# Altium PCB RAK3362_VB_260329_1.PcbDoc
Units mm, origin at the board's own origin, x right, y up, seen from the top; angles counter-clockwise.
Board outline 20 x 30 mm, 4 copper layers (Top Layer, gnd, power, Bottom Layer), stack 1 mm thick; 35 components, 51 nets, 161 pads, 201 vias.
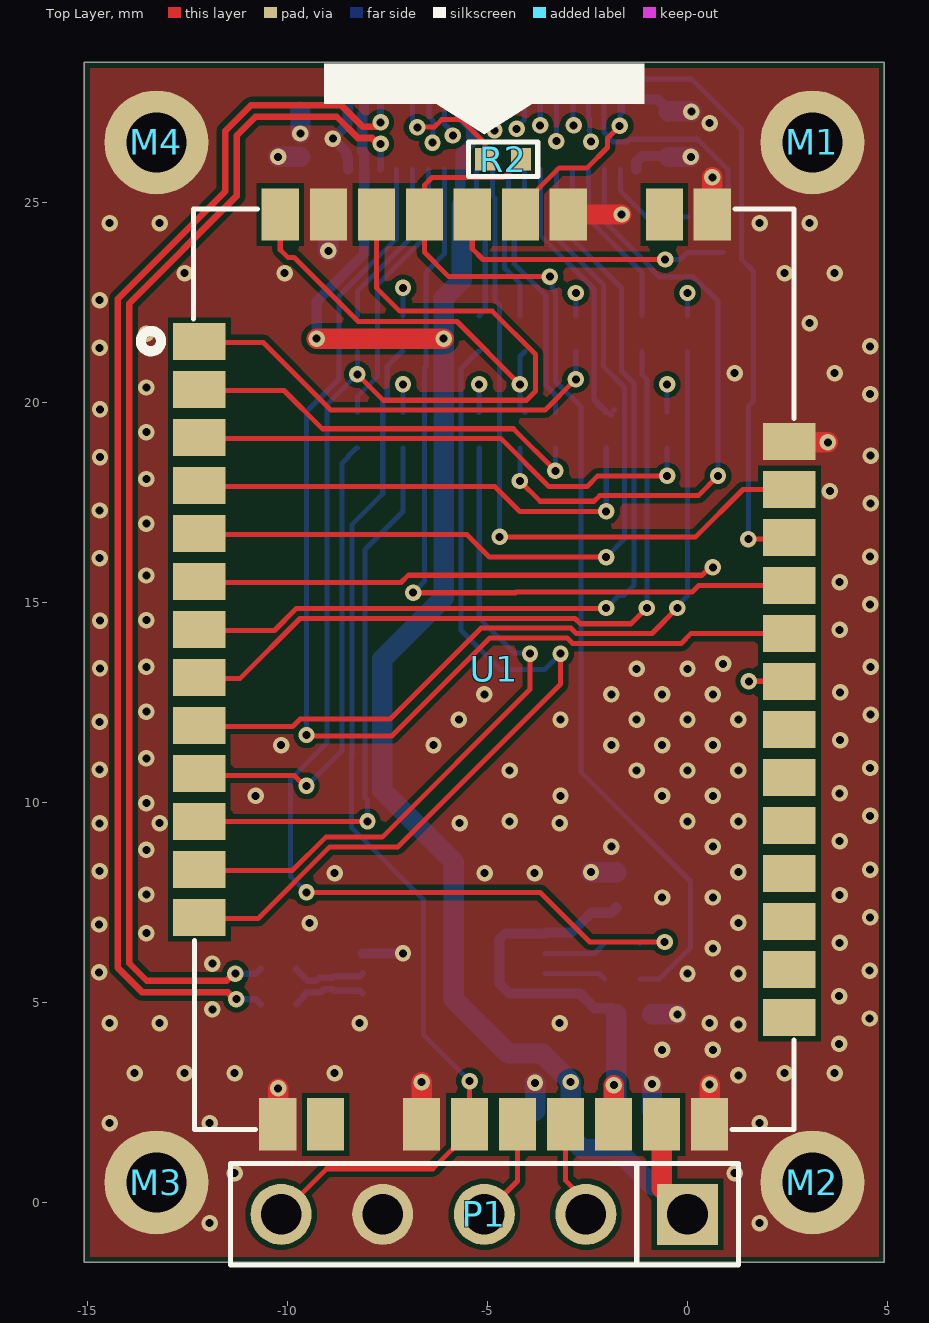
[diagram p0: Top Layer view]
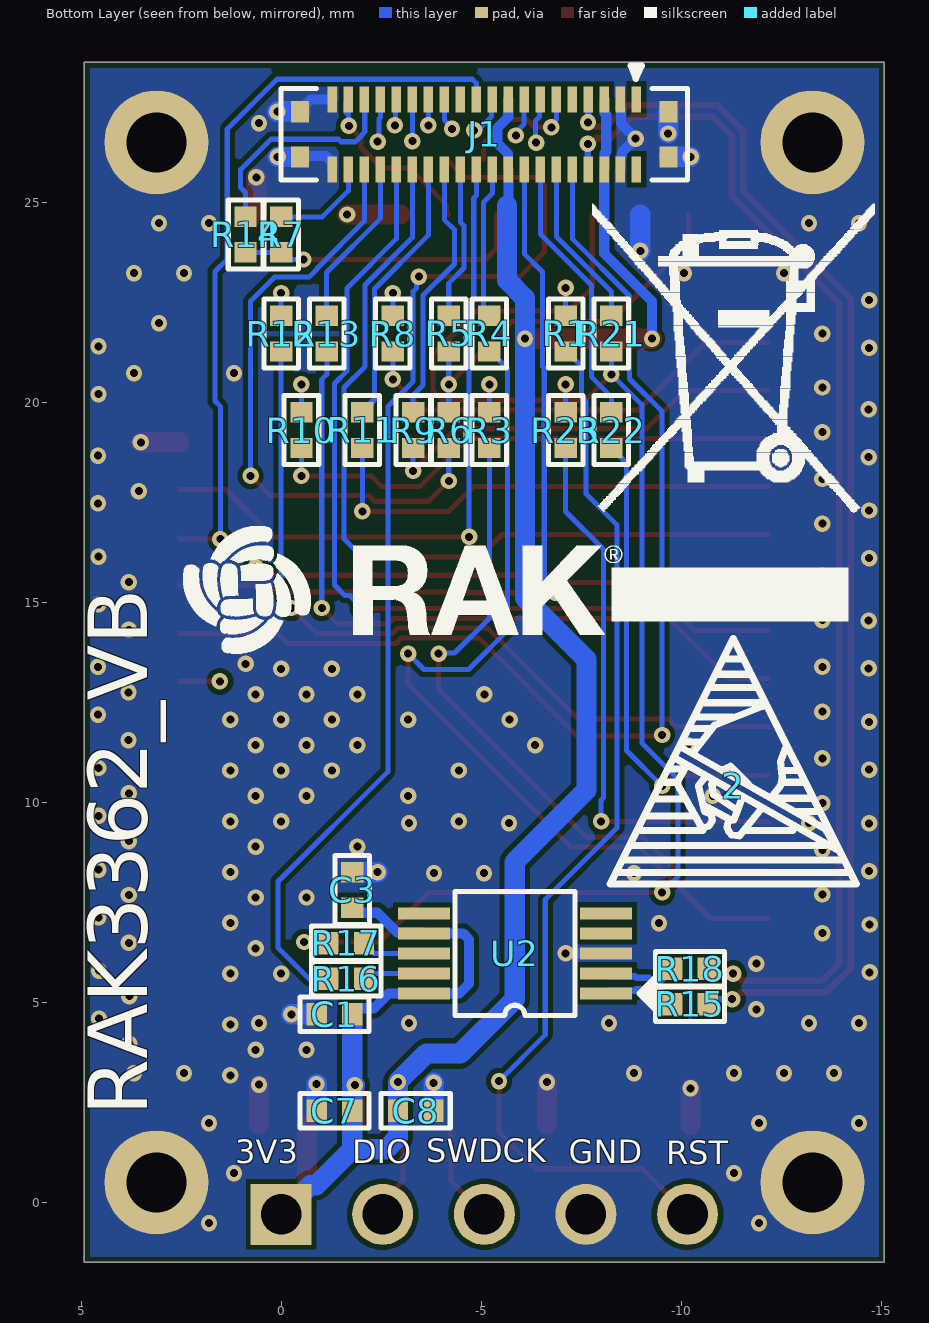
[diagram p1: Bottom Layer view, seen from below]
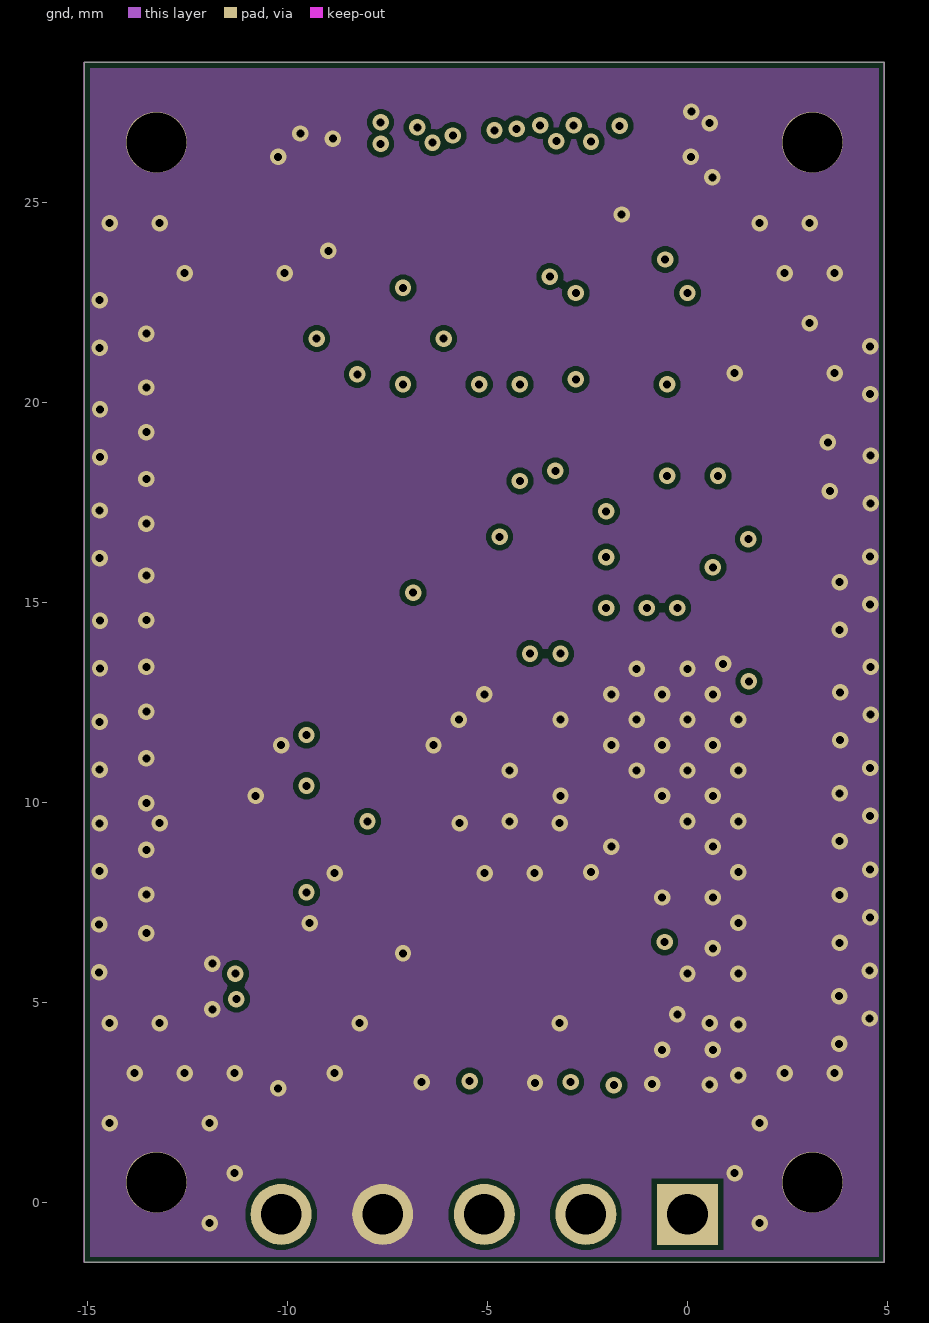
[diagram p2: gnd]
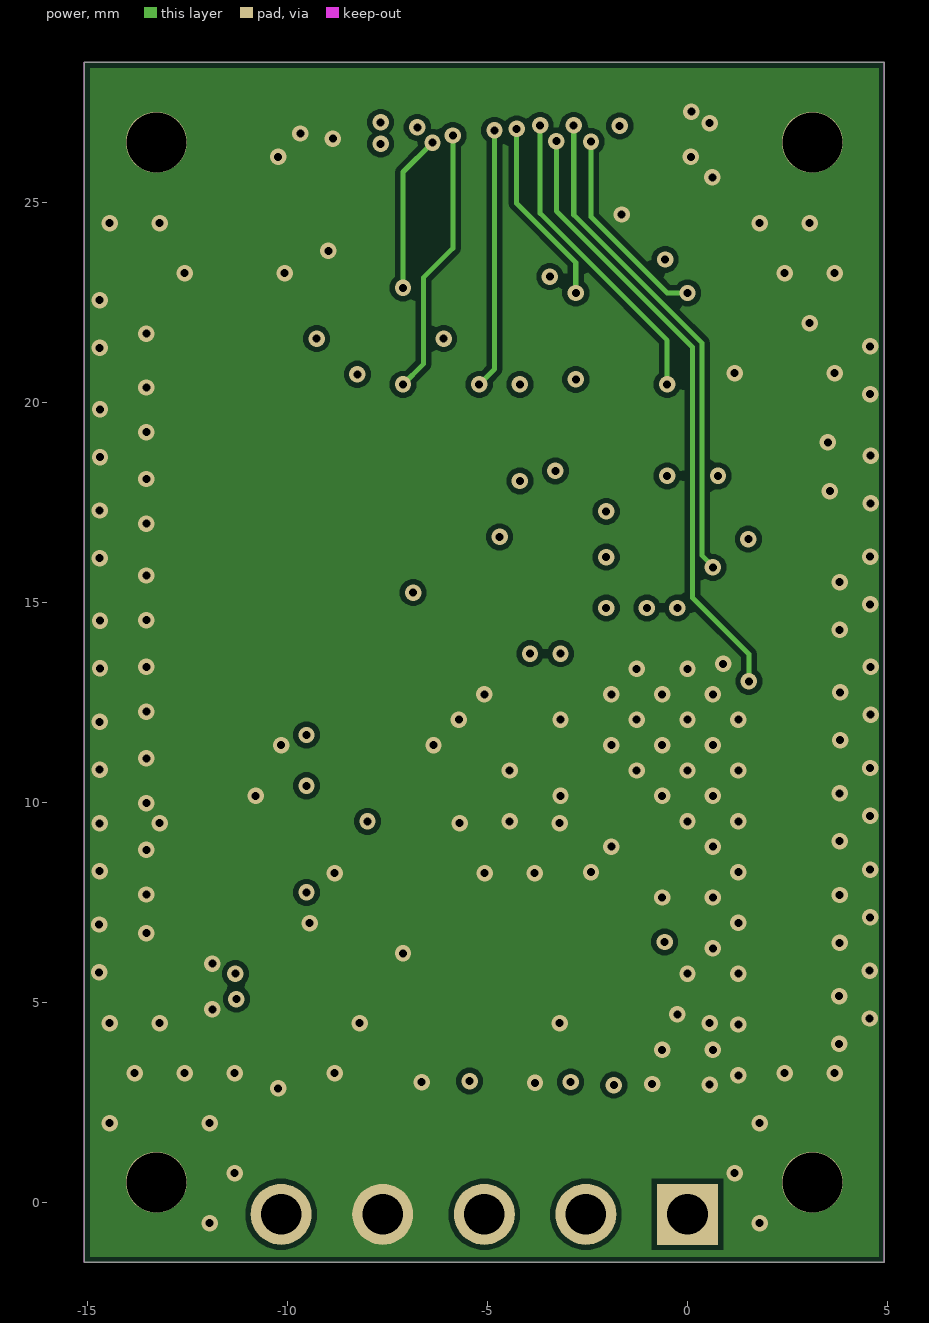
[diagram p3: power]

## Layer stack, top to bottom
Top Layer: signal copper 0.0356
Dielectric 2: prepreg 0.1524, PP-006, Dk 4.1
gnd: signal copper 0.0356
Dielectric 1: dielectric 0.553, FR-4, Dk 4.8
power: signal copper 0.0356
Dielectric 3: prepreg 0.1524, PP-006, Dk 4.1
Bottom Layer: signal copper 0.0356

## Board outline
-15.08,-1.5 4.92,-1.5 4.92,28.5 -15.08,28.5

## Design rules (kind name [scope] priority, off if disabled: settings)
Clearance rf_s [InNetClass('RF')] p1: gap=0.127 ignorepadtopadclearanceinfootprint=FALSE except(0.178: Arc-Fill Arc-Poly Arc-Region Track-Fill Track-Poly Track-Region)
Clearance [All] p2: gap=0.127 ignorepadtopadclearanceinfootprint=FALSE except(0.114: Arc-Arc Arc-Track Arc-SMDPad Track-Track Track-SMDPad)
DiffPairsRouting [All] p1: maxlimit=0.254 minlimit=0.119 mostfreqgap=0.119 toplayer_minwidth=0.165 toplayer_maxwidth=0.165 toplayer_prefwidth=0.165 midlayer1_minwidth=0.165 midlayer1_maxwidth=0.165 midlayer1_prefwidth=0.165 midlayer2_minwidth=0.165 midlayer2_maxwidth=0.165 midlayer2_prefwidth=0.165 bottomlayer_minwidth=0.165 bottomlayer_maxwidth=0.165 bottomlayer_prefwidth=0.165 maxuncoupledlength=12.7
MinimumSolderMaskSliver [All] p1: minsoldermaskwidth=0.05
PlaneConnect [All] p1: planeconnectstyle=Direct reliefexpansion=0.508 reliefentries=4 reliefconductorwidth=0.254 reliefairgap=0.254
PolygonConnect [All] p1: connectstyle=Direct reliefconductorwidth=0.254 reliefentries=4 polygonreliefangle="90 Angle" airgapwidth=0.254
RoutingPriority [InNetClass('RF_WIDTH')] p1: routingpriority=1
RoutingVias [All] p1: holewidth=0.2 width=0.41 viastyle="Through Hole" minholewidth=0.2 minwidth=0.41 maxholewidth=0.2 maxwidth=0.41
SilkToSilkClearance [All] p1: silktosilkclearance=0.025
SilkToSolderMaskClearance [IsPad] p1: minsilkscreentomaskgap=0.025 clearancetoexposedcopper=TRUE
SolderMaskExpansion [All] p1: expansion=0.102 istentingtop=FALSE
Width rf_p [InNetClass('RF')] p1: maxlimit=0.5 minlimit=0.257 preferedwidth=0.257
Width power_p [InNetClass('power')] p2: maxlimit=0.508 minlimit=0.254 preferedwidth=0.381
Width [InNetClass('All Nets')] p3: maxlimit=0.508 minlimit=0.127 preferedwidth=0.254
24 further rules are at their usual default settings.

## Classes and differential pairs
differential pair USBD: +USBD_P -USBD_N
differential pair NewDifferentialPair1: +USB_P -USB_N

## Components (designator, comment, footprint, x,y, rotation, side; value= is the part's Value field where it differs from the comment)
2 "Comment" ESD_ICON -11.303,10.414 r180 bottom
C1 "CAPACITOR NP" sc0402 -1.333,4.699 r180 bottom
C3 "CAPACITOR NP" sc0402 -1.778,7.81 r90 bottom
C7 "CAPACITOR NP" sc0402 -1.333,2.286 r180 bottom
C8 "CAPACITOR NP" sc0402 -3.365,2.286 r0 bottom
J1 "BTB40" BTB40_2X20_4MM_M -5.08,26.7 r270 bottom locked
M1 "LuoDingK" M15_26 3.12,26.5 r0 top
M2 "LuoDingK" M15_26 3.12,0.5 r0 top locked
M3 "LuoDingK" M15_26 -13.28,0.5 r180 top locked
M4 "LuoDingK" M15_26 -13.28,26.5 r180 top
P1 "Header1X5" PH254-115-05 -5.08,-0.3 r270 top locked
R1 "RESISTOR" sr0402 -7.112,21.717 r270 bottom
R2 "RESISTOR" sr0402 -4.609,26.078 r0 top
R3 "RESISTOR" sr0402 -5.207,19.304 r270 bottom
R4 "RESISTOR" sr0402 -5.207,21.717 r90 bottom
R5 "RESISTOR" sr0402 -4.191,21.717 r270 bottom
R6 "RESISTOR" sr0402 -4.191,19.304 r90 bottom
R7 "RESISTOR" sr0402 0,24.194 r270 bottom
R8 "RESISTOR" sr0402 -2.794,21.717 r270 bottom
R9 "RESISTOR" sr0402 -3.302,19.304 r90 bottom
R10 "RESISTOR" sr0402 -0.508,19.304 r270 bottom
R11 "RESISTOR" sr0402 -2.032,19.304 r90 bottom
R12 "RESISTOR" sr0402 0,21.717 r270 bottom
R13 "RESISTOR" sr0402 -1.143,21.717 r90 bottom
R14 "RESISTOR" sr0402 0.889,24.194 r270 bottom
R15 "RESISTOR" sr0402 -10.223,4.953 r180 bottom
R16 "RESISTOR" sr0402 -1.629,5.588 r180 bottom
R17 "RESISTOR" sr0402 -1.63,6.477 r180 bottom
R18 "RESISTOR" sr0402 -10.223,5.842 r180 bottom
R21 "RESISTOR" sr0402 -8.255,21.717 r90 bottom
R22 "RESISTOR" sr0402 -8.255,19.304 r90 bottom
R23 "RESISTOR" sr0402 -7.112,19.304 r270 bottom
U1 "RAK3162" RAK4630 -4.83,13.323 r0 top
U2 "CH340E" MSOP-10 -5.842,6.223 r0 bottom
? "Comment" BIN_WEEE -11.303,21.082 r180 bottom

## Footprints (in the part's own frame and the unit in brackets; to place one, negate y for a bottom-side part, rotate by r counter-clockwise, add the part's x,y. Pads: shape width x height; smd on the part's side, far side on the other; paste and mask are expansions set on the pad)
BIN_WEEE [mm]
  silkscreen extent -3.52,-6.56 3.54,3.87
BTB40_2X20_4MM_M [mm] "BTB40_2X20_4MM_M"
  rect 0.65x0.23 smd mask+0.051: 1(-0.874,3.8) 2(0.876,3.8) 3(-0.874,3.4) 4(0.876,3.4) 5(-0.874,3) 6(0.876,3) 7(-0.874,2.6) 8(0.876,2.6) 9(-0.874,2.2) 10(0.876,2.2) 11(-0.874,1.8) 12(0.876,1.8) 13(-0.874,1.4) 14(0.876,1.4) 15(-0.874,1) 16(0.876,1) 17(-0.874,0.6) 18(0.876,0.6) 19(-0.874,0.2) 20(0.876,0.2) 21(-0.874,-0.2) 22(0.876,-0.2) 23(-0.874,-0.6) 24(0.876,-0.6) 25(-0.874,-1) 26(0.876,-1) 27(-0.874,-1.4) 28(0.876,-1.4) 29(-0.874,-1.8) 30(0.876,-1.8) 31(-0.874,-2.2) 32(0.876,-2.2) 33(-0.874,-2.6) 34(0.876,-2.6) 35(-0.874,-3) 36(0.876,-3) 37(-0.874,-3.4) 38(0.876,-3.4) 39(-0.874,-3.8) 40(0.876,-3.8)
  rect 0.53x0.45 smd mask+0.051: F1(0.566,4.605) F2(-0.564,4.605) F3(-0.564,-4.605) F4(0.566,-4.605)
  silkscreen extent -1.71,-5.08 1.14,5.08, body extent -1,-4.9 1,4.9, height 0.65
ESD_ICON [mm]
  silkscreen extent -3.08,-2.45 3.08,3.68
M15_26 [mm] "M15_26"
  round 2.6 / inner round 1.524 / far side round 2.6 hole 1.5: 1(0,0)
MSOP-10 [mm] "MSOP-10"
  rect 1.3x0.3 smd: 1(-2.275,1) 2(-2.275,0.5) 3(-2.275,0) 4(-2.275,-0.5) 5(-2.275,-1) 6(2.275,-1) 7(2.275,-0.5) 8(2.275,0) 9(2.275,0.5) 10(2.275,1)
  silkscreen extent -3.5,-1.55 1.5,1.55, body extent -2.5,-1.5 2.5,1.5, height 1.1
PH254-115-05 [mil] "PH254-115-04"
  rect 60x60 hole 40: 1(0,200)
  round 60 hole 40: 2(0,100) 3(0,0) 4(0,-100) 5(0,-200)
  silkscreen extent -50,-250 50,250
RAK4630 [mil] "RAK4630"
  rect 51.5x36.5 smd: 1(-290.3,322.75) 2(-290.3,275.55) 3(-290.3,228.35) 4(-290.3,181.05) 5(-290.3,133.75) 6(-290.3,86.55) 7(-290.3,39.35) 8(-290.3,-7.85) 9(-290.3,-55.15) 10(-290.3,-102.45) 11(-290.3,-149.65) 12(-290.3,-196.85) 13(-290.3,-244.15) 23(290.3,-342.55) 24(290.3,-295.25) 25(290.3,-248.05) 26(290.3,-200.75) 27(290.3,-153.55) 28(290.3,-106.35) 29(290.3,-59.05) 30(290.3,-11.75) 31(290.3,35.45) 32(290.3,82.65) 33(290.3,129.95) 34(290.3,177.15) 35(290.3,224.45)
  rect 36.5x51.5 smd: 14(-213.2,-447.75) 15(-166,-447.75) 16(-71.5,-447.75) 17(-24.3,-447.75) 18(22.9,-447.75) 19(70.2,-447.75) 20(117.4,-447.75) 21(164.7,-447.75) 22(211.9,-447.75) 36(214.5,447.75) 37(167.3,447.75) 38(72.8,447.75) 39(25.6,447.75) 40(-21.7,447.75) 41(-68.9,447.75) 42(-116.1,447.75) 43(-163.4,447.75) 44(-210.7,447.75)
  silkscreen extent -348,-453 295,453, body extent -295,-453 295,453, height 118
sc0402 [mil] "SC0402"
  rect 20x22 smd: 1(-17.5,0) 2(17.5,0)
  silkscreen extent -34,-17 34,17, body extent -20,-10 20,10, height 20
sr0402 [mil] "SR0402"
  rect 20x22 smd mask+2: 1(-17.5,0) 2(17.5,0)
  silkscreen extent -34,-17 34,17, body extent -20,-10 20,10, height 14

## Free pads (board coordinates)
  round 1.5 hole 2 unplated: 7(-22.581,1.5) 7(-22.58,100.4) 7(121.419,1.5) 7(121.42,100.4)

## Via types
v1: diameter 0.41, hole 0.2, Top Layer to Bottom Layer, tented both sides, 201 vias

## Nets (pads, with @x,y where several pads share a name; then routed paths per layer and width w, separated by ;. In a path a pad name is that pad's centre, name@x,y a point inside that pad or via, vN(x,y) a via of type N, cw(c..) or ccw(c..) an arc to the next point about the centre after c; other vN are vias at no path point)
3V3: C1.2 C3.1 C7.2 C8.2 J1.5 J1.6 J1.17 J1.18 P1.1 U1.20 U1.21 U2.7 U2.10 | length 57.2
  Top Layer w0.508: v1(-9.271,21.59) v1(-6.096,21.59) ; U1.20 -1.844,1.955 v1(-1.844,2.928) ; U1.21 -0.646,0.346 P1.1
  Bottom Layer w0.254: v1(-9.271,21.59) -9.271,22.529 -8.08,23.72 J1.6 -8.092,25.836 -8.092,26.233 -8.13,26.27 -8.13,27.19 -8.092,27.228 J1.5@-8.092,27.562 ; J1.17 -5.68,27.132 -5.408,26.86 -5.408,26.48 -5.668,26.22 -5.668,25.836 -5.681,25.823 -5.681,24.951 -5.648,24.919 ; C1.2@-1.905,4.851 -2.321,4.851 -2.692,5.223 -4.461,5.223 -4.699,5.461 -4.699,6.574 -4.55,6.723 U2.7 -3.544,6.746 -2.903,6.746 -2.41,7.239 -1.905,7.239 C3.1 C3.1@-1.803,7.366
  Bottom Layer w0.508: -5.648,24.919 -5.648,23.054 -6.096,22.606 v1(-6.096,21.59) -6.096,15.113 -7.633,13.576 -7.633,10.3 -5.842,8.509 -5.842,5.08 -4.483,3.721 -3.633,3.721 v1(-2.921,3.008) -2.921,1.628 -2.623,1.33 -1.778,1.33 ; C1.2 -1.778,2.993 v1(-1.844,2.928) -1.778,2.862 C7.2 -1.778,1.33 ; P1.1 -0.73,0.43 -0.878,0.43 -1.778,1.33
GND: C1.1 C3.2 C7.1 C8.1 J1.3 J1.4 J1.39 J1.40 J1.F1 J1.F2 J1.F3 J1.F4 M1.1 M2.1 M3.1 M4.1 P1.4 U1.14 U1.16 U1.22 U1.35 U1.36 U1.38 U1.43 U2.3 | length 17
  Top Layer w0.508: U1.14@-10.234,1.926 v1(-10.234,2.847) ; U1.16 v1(-6.646,3.005) ; U1.38 v1(-1.648,24.696) ; U1.22 v1(0.552,2.942) ; U1.36 0.619,24.697 v1(0.619,25.627) ; U1.35@2.555,19 v1(3.506,19)
  Bottom Layer w0.254: v1@-8.865,26.59 -8.524,26.249 -8.524,26.143 -8.492,26.112 -8.492,25.836 J1.4 ; v1(-8.865,26.594) -8.498,26.96 -8.498,27.343 -8.48,27.361 J1.3@-8.48,27.376 ; U2.3 v1(-7.112,6.223) ; J1.40 -1.28,26.01 -1.135,26.156 -0.496,26.156 J1.F4 ; J1.39@-1.28,27.761 J1.39 -0.745,27.574 -0.475,27.304 J1.F3
  Bottom Layer w0.508: v1(-10.236,26.137) -9.687,26.137 J1.F1 ; J1.F2 -9.677,27.257 v1(-9.677,26.721) ; v1(-8.98,23.786) -8.98,24.696 ; v1(-3.812,2.986) -3.81,2.984 C8.1 ; v1(-2.413,8.255) C3.2 ; C7.1 -0.889,2.954 v1(-0.884,2.959) ; C1.1 v1(-0.254,4.699) ; J1.F4 v1(0.085,26.134) ; J1.F3 -0.466,27.273 0.087,27.273 v1(0.095,27.264)
  other v1: -11.947,-0.521 1.803,-0.521 -11.322,0.729 1.178,0.729 -14.447,1.979 -11.947,1.979 1.803,1.979 1.27,3.175 -13.822,3.229 -12.572,3.229 -11.322,3.229 -8.822,3.229 2.428,3.229 3.678,3.229 -0.635,3.81 0.635,3.81 3.792,3.961 1.27,4.445 -14.447,4.479 -13.197,4.479 -8.197,4.479 -3.197,4.479 0.553,4.479 4.554,4.596 -11.88,4.825 3.792,5.155 0,5.715 1.27,5.715 -14.711,5.751 4.554,5.79 -11.88,5.968 0.635,6.35 3.804,6.489 -13.531,6.73 -14.711,6.945 -9.447,6.979 1.27,6.985 4.566,7.124 -0.635,7.62 0.635,7.62 3.804,7.683 -13.531,7.695 -8.822,8.229 -5.072,8.229 -3.822,8.229 1.27,8.255 -14.699,8.279 4.566,8.318 -13.531,8.812 -1.905,8.89 0.635,8.89 3.804,9.029 -14.699,9.473 -13.197,9.479 -5.697,9.479 -3.197,9.479 -4.445,9.525 0,9.525 1.27,9.525 4.566,9.664 -13.531,9.981 -10.795,10.16 -3.175,10.16 -0.635,10.16 0.635,10.16 3.804,10.223 -4.445,10.795 -1.27,10.795 0,10.795 1.27,10.795 -14.699,10.819 4.566,10.858 -13.531,11.098 -10.16,11.43 -6.35,11.43 -1.905,11.43 -0.635,11.43 0.635,11.43 3.816,11.557 -14.699,12.013 -5.715,12.065 -3.175,12.065 -1.27,12.065 0,12.065 1.27,12.065 4.578,12.192 -13.531,12.267 -5.08,12.7 -1.905,12.7 -0.635,12.7 0.635,12.7 3.816,12.751 -14.687,13.347 -1.27,13.335 0,13.335 -13.531,13.384 4.578,13.386 0.889,13.462 3.804,14.312 -14.687,14.541 -13.531,14.553 4.566,14.947 3.804,15.506 -13.531,15.67 -14.699,16.102 4.566,16.141 -13.531,16.966 -14.699,17.296 4.578,17.475 3.556,17.78 -13.531,18.083 -14.687,18.63 4.578,18.669 -13.531,19.252 -14.687,19.824 4.566,20.205 -13.531,20.369 1.178,20.729 3.678,20.729 -14.699,21.36 4.566,21.399 -13.531,21.716 3.053,21.979 -14.699,22.554 -12.572,23.229 -10.072,23.229 2.428,23.229 3.678,23.229 -14.447,24.479 -13.197,24.479 1.803,24.479 3.053,24.479 0.553,26.979
I2C2_SCL: J1.36 R6.1 | length 15.6
  Top Layer w0.127: v1(-4.191,18.034) -3.683,17.526 -2.337,17.526 -2.196,17.668 0.269,17.668 v1(0.762,18.161)
  Bottom Layer w0.127: v1(-4.191,18.034) R6.1 ; J1.36 -2.08,24.533 -0.895,23.348 -0.895,23.324 -0.699,23.129 0.164,23.129 0.762,22.53 v1(0.762,18.161)
I2C2_SDA: J1.35 R14.1 | length 5.6
  Bottom Layer w0.127: J1.35 -2.09,27.565 -2.09,26.754 -2.017,26.681 -2.017,26.673 -1.858,26.514 -1.502,26.514 -1.439,26.577 0.252,26.577 1.015,25.815 1.015,25.372 0.889,25.247 R14.1
NetJ1_11: J1.11 R2.1 | length 3.2
  Top Layer w0.127: v1(-6.756,26.873) -6.742,26.888 -6.324,26.888 -6.146,27.066 -5.654,27.066 -5.062,26.474 -5.062,26.087 R2.1
  Bottom Layer w0.127: J1.11 -6.88,27.073 -6.756,26.95 v1(-6.756,26.873)
NetJ1_12: J1.12 R21.2 | length 4.2
  Bottom Layer w0.127: R21.2 -8.255,22.773 -6.88,24.148 J1.12
NetJ1_13: J1.13 R1.1 | length 5.8
  power w0.127: v1(-7.112,22.86) -7.112,25.756 v1(-6.375,26.492)
  Bottom Layer w0.127: R1.1 v1(-7.112,22.86) ; J1.13 -6.461,27.556 -6.461,27.138 -6.361,27.037 -6.361,26.507 v1(-6.375,26.492)
NetJ1_14: J1.14 R22.2 | length 6.8
  Bottom Layer w0.127: R22.2 -8.255,20.142 -7.756,20.641 -7.756,22.931 -6.48,24.206 J1.14
NetJ1_15: J1.15 R23.1 | length 8.4
  power w0.127: v1(-7.112,20.447) -6.604,20.955 -6.604,23.114 -5.867,23.851 v1(-5.867,26.67)
  Bottom Layer w0.127: R23.1 v1(-7.112,20.447) ; J1.15 -6.076,27.57 -6.076,26.955 -5.867,26.747 v1(-5.867,26.67)
NetJ1_19: J1.19 R3.1 | length 8.2
  power w0.127: v1(-5.207,20.447) -4.826,20.828 v1(-4.826,26.797)
  Bottom Layer w0.127: J1.19 -5.258,27.553 -5.258,27.141 -5.104,26.986 -5.104,26.974 -4.981,26.851 -4.88,26.851 v1(-4.826,26.797) ; R3.1 v1(-5.207,20.447)
NetJ1_20: J1.20 R4.2 | length 3.8
  Bottom Layer w0.127: J1.20 -5.28,25.219 -5.056,24.995 -5.056,22.312 R4.2
NetJ1_25: J1.25 R8.1 | length 6.1
  power w0.127: v1(-4.272,26.837) -4.272,24.973 -2.794,23.495 v1(-2.794,22.733)
  Bottom Layer w0.127: v1(-4.272,26.837) -4.272,26.867 -4.08,27.059 J1.25 ; R8.1 v1(-2.794,22.733)
NetJ1_26: J1.26 R9.2 | length 6.6
  Bottom Layer w0.127: J1.26 -4.08,24.566 -4.333,24.314 -4.333,23.458 -3.543,22.669 -3.543,20.423 -3.302,20.181 R9.2
NetJ1_27: J1.27 R10.1 | length 9.1
  power w0.127: v1(-3.683,26.924) -3.683,24.725 -0.508,21.55 v1(-0.508,20.447)
  Bottom Layer w0.127: v1(-3.683,26.924) -3.682,26.925 J1.27 J1.27 ; R10.1 v1(-0.508,20.447)
NetJ1_28: J1.28 R11.2 | length 7.4
  Bottom Layer w0.127: J1.28 -3.68,24.178 -2.337,22.835 -2.337,20.091 ; R11.2 -2.057,19.748 -2.248,19.939 -2.248,19.964 -2.337,20.053 -2.337,20.091 ; R11.2@-1.905,19.685 -1.93,19.685 -2.337,20.091 ; R11.2@-1.854,19.812 R11.2@-1.829,19.812
NetJ1_33: J1.33 R12.1 | length 6.7
  power w0.127: v1(-2.413,26.518) -2.413,24.638 -0.508,22.733 v1(0,22.733)
  Bottom Layer w0.127: J1.33 -2.48,27.119 -2.449,27.088 -2.449,26.554 v1(-2.413,26.518) ; R12.1 v1(0,22.733)
NetJ1_34: J1.34 R13.2 | length 4.2
  Bottom Layer w0.127: J1.34 -2.48,24.592 -1.136,23.248 -1.136,22.168 R13.2
NetR16_2: R16.2 U2.9 | length 1.5
  Bottom Layer w0.127: U2.9 -2.209,5.723 R16.2
NetR17_2: R17.2 U2.8 | length 1.6
  Bottom Layer w0.127: U2.8 -2.328,6.223 R17.2
P0.02/I2C_SDA: R3.2 U1.12 | length 16.9
  Top Layer w0.127: U1.12@-12.192,8.299 -9.874,8.299 -9.043,9.129 -7.635,9.129 -3.937,12.827 v1(-3.937,13.716)
  Bottom Layer w0.127: R3.2 -5.207,14.605 -4.333,13.731 -3.952,13.731 v1(-3.937,13.716)
P0.03/I2C_SCK: R4.1 U1.13 | length 22.4
  Top Layer w0.127: U1.13@-12.192,7.097 -10.734,7.097 -8.943,8.888 -7.241,8.888 -3.175,12.954 v1(-3.175,13.716)
  Bottom Layer w0.127: R4.1 -5.232,21.273 -5.423,21.082 -5.664,20.841 -5.664,14.3 -4.684,13.32 -3.571,13.32 v1(-3.175,13.716)
P1.00: J1.10 U1.31 | length 28.3
  Top Layer w0.127: v1(-9.525,11.684) -9.498,11.657 -7.393,11.657 -4.938,14.112 -3.011,14.112 -2.87,13.97 -0.16,13.97 0.094,14.224 U1.31
  Bottom Layer w0.127: v1(-9.525,11.684) -9.525,19.772 -8.712,20.585 -8.712,22.657 -7.28,24.089 J1.10
P1.01: J1.16 U1.32 | length 20.4
  Top Layer w0.127: v1(-6.858,15.24) -4.305,15.24 -4.29,15.255 0.112,15.255 0.281,15.423 U1.32
  Bottom Layer w0.127: v1(-6.858,15.24) -6.579,15.52 -6.579,20.856 -6.534,20.901 -6.534,23.26 -6.08,23.714 J1.16
P1.02_IO5: J1.37 U1.39 | length 4.8
  Top Layer w0.127: U1.39 -4.138,24.738 -4.138,24.929 -3.205,25.862 -2.51,25.862 -1.999,26.372 -1.999,26.605 v1(-1.694,26.909) v1@-1.694,26.993
  Bottom Layer w0.127: v1(-1.694,26.909) -1.687,26.916 -1.687,27.567 J1.37 -1.629,27.523 -1.629,27.232
P1.03: R7.2 R14.2 U1.40 | length 7.3
  Top Layer w0.127: U1.40 -5.381,23.84 -5.112,23.571 v1(-0.559,23.571)
  Bottom Layer w0.127: v1(-0.559,23.571) -0.178,23.571 R7.2 R14.2
P1.03_IO6: J1.38 R7.1 | length 2.5
  Bottom Layer w0.127: J1.38 -1.68,25.287 -1.031,24.638 R7.1
P1.04/AIN0: J1.21 U1.33 | length 18.7
  Top Layer w0.127: v1(1.52,16.582) 2.501,16.582 U1.33
  Bottom Layer w0.127: J1.21 -4.88,27.976 -4.779,28.077 0.103,28.077 1.346,26.834 1.346,23.578 1.651,23.273 1.651,20.031 1.52,19.9 v1(1.52,16.582)
P1.05/AIN1: J1.22 U1.34 | length 17
  Top Layer w0.127: v1@-4.661,16.599 v1(-4.699,16.637) 0.204,16.637 1.39,17.823 U1.34
  Bottom Layer w0.127: J1.22 -4.88,25.167 -4.815,25.102 -4.815,22.554 -4.699,22.438 v1(-4.699,16.637)
P1.06/UART0_TX: R2.2 R16.1 U1.41 | length 27.6
  Top Layer w0.127: R2.2 -4.164,26.053 -4.596,25.621 -6.386,25.621 -6.58,25.427 U1.41 -6.58,23.756 -5.967,23.142 v1(-3.442,23.142)
  Bottom Layer w0.127: v1(-3.442,23.142) -3.388,23.088 -3.388,22.855 -3.302,22.769 -3.302,20.523 -2.958,20.178 -2.947,20.178 -2.667,19.898 -2.667,10.765 0.077,8.021 0.077,6.364 -0.699,5.588 R16.1
P1.07/UART0_RX: R17.1 R21.1 U1.42 | length 36.7
  Top Layer w0.127: v1(-9.525,7.747) -3.683,7.747 -2.445,6.509 v1(-0.574,6.509) ; v1(-8.255,20.701) -7.605,20.051 -4.027,20.051 -3.795,20.283 -3.795,21.194 -4.879,22.278 -7.192,22.278 -7.779,22.865 U1.42
  Bottom Layer w0.127: v1(-9.525,7.747) -9.921,8.143 -9.921,10.578 -9.017,11.481 -9.017,19.939 v1(-8.255,20.701) R21.1 ; R17.1 -1.153,6.509 v1(-0.574,6.509)
P1.08: R5.2 R6.2 U1.44 | length 9.9
  Top Layer w0.127: U1.44 -10.182,23.814 -9.992,23.624 -9.837,23.624 -8.234,22.022 -5.766,22.022 v1(-4.191,20.447)
  Bottom Layer w0.127: R6.2@-4.064,19.748 -4.191,19.875 v1(-4.191,20.447) -4.191,21.145 R5.2@-4.064,21.273
P1.08_IO7: J1.24 R5.1 | length 3.9
  Bottom Layer w0.127: J1.24 -4.48,24.508 -4.574,24.414 -4.574,23.358 -4.191,22.975 R5.1
P1.14_IO1: J1.29 U1.30 | length 17.6
  Top Layer w0.127: v1(1.533,13.026) 2.543,13.026 U1.30
  power w0.127: v1(-3.28,26.531) -3.28,24.783 0.125,21.378 0.125,15.114 1.533,13.705 v1(1.533,13.026)
  Bottom Layer w0.127: v1(-3.28,26.531) J1.29
P2.00/SPI_CS: R8.2 U1.1 | length 11.1
  Top Layer w0.127: U1.1@-12.192,21.497 -10.606,21.497 -8.919,19.81 -3.558,19.81 v1(-2.794,20.574)
  Bottom Layer w0.127: v1(-2.794,20.574) R8.2
P2.01/SPI_SCK: R9.1 U1.2 | length 10.3
  Top Layer w0.127: U1.2@-12.192,20.298 -10.088,20.298 -9.13,19.34 -4.354,19.34 v1(-3.302,18.288)
  Bottom Layer w0.127: v1(-3.302,18.288) R9.1
P2.02/SPI_MISO: R10.2 U1.3 | length 13
  Top Layer w0.127: U1.3@-12.192,19.099 -4.672,19.099 -3.466,17.892 -2.515,17.892 -2.246,18.161 v1(-0.508,18.161)
  Bottom Layer w0.127: v1(-0.508,18.161) R10.2
P2.03/SPI_MOSI: R11.1 U1.4 | length 12
  Top Layer w0.127: U1.4@-12.192,17.897 -4.816,17.897 -4.191,17.272 v1(-2.032,17.272)
  Bottom Layer w0.127: v1(-2.032,17.272) R11.1
P2.04_IO2: J1.30 U1.5 | length 21
  Top Layer w0.127: U1.5@-12.192,16.696 -5.52,16.696 -4.953,16.129 v1(-2.032,16.129)
  Bottom Layer w0.127: J1.30 -3.28,24.12 -2.095,22.935 -2.095,20.892 -1.575,20.371 -1.575,16.586 v1(-2.032,16.129)
P2.05_IO3: J1.31 U1.6 | length 26.1
  Top Layer w0.127: U1.6@-12.192,15.497 -7.16,15.497 -6.981,15.677 0.36,15.677 0.558,15.875 v1(0.635,15.875)
  power w0.127: v1(-2.845,26.924) -2.845,24.689 0.366,21.478 0.366,16.166 0.635,15.897 v1(0.635,15.875)
  Bottom Layer w0.127: J1.31 -2.862,27.557 -2.862,26.942 v1(-2.845,26.924)
P2.06_IO4: J1.32 U1.7 | length 22.4
  Top Layer w0.127: U1.7@-12.192,14.298 -10.326,14.298 -9.78,14.844 -2.047,14.844 v1(-2.032,14.859)
  Bottom Layer w0.127: J1.32 -2.88,24.089 -1.651,22.86 -1.651,20.788 -1.333,20.471 -1.333,15.43 -1.592,15.172 -1.719,15.172 v1(-2.032,14.859)
P2.07/UART1_RX: R13.1 U1.8 | length 18.5
  Top Layer w0.127: U1.8@-12.192,13.099 -11.184,13.099 -9.689,14.594 -2.811,14.594 -2.681,14.463 -1.412,14.463 v1(-1.016,14.859)
  Bottom Layer w0.127: R13.1 -1.143,20.701 -1.016,20.574 v1(-1.016,14.859)
P2.08/UART1_TX: R12.2 U1.9 | length 19.8
  Top Layer w0.127: U1.9@-12.192,11.898 -9.87,11.898 -9.689,12.08 -7.437,12.08 -5.163,14.353 -2.911,14.353 -2.781,14.222 -0.891,14.222 v1(-0.254,14.859)
  Bottom Layer w0.127: v1(-0.254,14.859) -0.254,14.91 0,15.164 R12.2
P2.09_LED1: R22.1 U1.10 | length 11.8
  Top Layer w0.127: U1.10@-12.192,10.696 -12.164,10.668 -9.83,10.668 -9.576,10.414 v1(-9.525,10.414)
  Bottom Layer w0.127: v1(-9.525,10.414) -9.513,10.414 -8.634,11.293 -8.634,18.48 -8.471,18.644 -8.471,18.669 -8.28,18.86 R22.1
P2.10_LED2: R23.2 U1.11 | length 14
  Top Layer w0.127: U1.11@-12.192,9.498 -12.165,9.525 v1(-8.001,9.525)
  Bottom Layer w0.127: v1(-8.001,9.525) -8.001,10.057 -8.064,10.121 -8.064,16.319 -7.112,17.272 R23.2
RESET: P1.5 R1.2 U1.17 | length 26.8
  Top Layer w0.127: P1.5 -9.021,0.839 -6.368,0.839 -5.447,1.76 U1.17 v1(-5.447,3.03)
  Bottom Layer w0.127: R1.2 -7.137,21.273 -7.508,20.902 -7.508,20.138 -7.62,20.025 -7.62,17.711 -8.393,16.939 -8.393,11.193 -8.397,11.19 -8.397,9.361 -6.604,7.569 -6.604,4.187 v1(-5.447,3.03)
SWDCLK: P1.3 U1.18 | length 2.6
  Top Layer w0.127: P1.3 -4.248,0.532 U1.18
SWDIO: P1.2 U1.19 | length 2.5
  Top Layer w0.127: U1.19 -3.047,0.54 -2.54,0.034 P1.2
USB_N: J1.8 R18.2 | length 30.1
  Top Layer w0.165: v1(-11.303,5.715) -11.347,5.715 -11.522,5.54 -12.821,5.54 -13.519,5.54 -13.957,5.978 -13.957,22.47 -11.273,25.155 -11.273,26.666 -10.801,27.138 -8.77,27.138 -8.241,26.609 -7.886,26.609 -7.737,26.46 v1(-7.67,26.46)
  Bottom Layer w0.165: v1(-11.303,5.715) -10.795,5.715 R18.2 ; J1.8 -7.67,25.834 v1(-7.67,26.46)
USB_P: J1.7 R15.2 | length 31
  Top Layer w0.165: v1(-11.278,5.08) -11.322,5.08 -11.497,5.255 -12.688,5.255 -13.637,5.255 -14.242,5.86 -14.242,22.588 -11.557,25.273 -11.557,26.784 -10.918,27.422 -8.652,27.422 -8.123,26.894 -7.793,26.894 -7.686,27 v1(-7.671,27)
  Bottom Layer w0.165: v1(-11.278,5.08) -10.795,5.08 R15.2 ; J1.7 -7.675,27.57 -7.675,27.005 v1(-7.671,27)
USBD_N: R18.1 U2.2 | length 1.9
  Bottom Layer w0.165: R18.1 -9.779,5.817 -9.502,5.54 -9.277,5.54 -9.202,5.615 -8.875,5.615 -8.835,5.655 -8.185,5.655 U2.2
USBD_P: R15.1 U2.1 | length 1.9
  Bottom Layer w0.165: R15.1 -9.608,5.124 -9.608,5.159 -9.511,5.255 -9.16,5.255 -9.084,5.331 -8.875,5.331 -8.835,5.29 -8.185,5.29 U2.1
pads on no net: J1.1 J1.2 J1.9 J1.23 U1.15 U1.23 U1.24 U1.25 U1.26 U1.27 U1.28 U1.29 U1.37 U2.4 U2.5 U2.6

## Polygon pours and split planes (outlines as drawn)
GND on gnd "NONET_L-01_P-001" (solid, remove dead copper, pour order 0): -15.08,28.98 5.24,28.98 5.24,-1.5 -15.08,-1.5
GND on power "NONET_L-01_P-001" (solid, remove dead copper, pour order 1): -15.08,28.98 5.24,28.98 5.24,-1.5 -15.08,-1.5
GND on Top Layer "NONET_L-01_P-001" (solid, remove dead copper, pour order 3): -15.08,-1.5 -15.08,28.5 4.92,28.5 4.92,-1.5
GND on Bottom Layer "NONET_L-01_P-001" (solid, remove dead copper, pour order 2): -15.08,-1.5 -15.08,28.5 4.92,28.5 4.92,-1.5

## Keep-outs
Keep-Out Layer:
  lines w0.013: -15.08,-1.5 -15.08,28.5 -9.08,28.5 -1.08,28.5 4.92,28.5 4.92,-1.5 -15.08,-1.5

## Silkscreen, mask and mechanical layers (free items; w line width, h text height)
Bottom Overlay:
  drawing of 17 lines, arcs and shapes, not listed
  text "RAK3362_VB" at 2.864,2.159 h2.54 r270
  text "SWDCK" at -3.632,0.798 h1
  text "GND" at -7.188,0.773 h1
  text "DIO" at -1.778,0.773 h1
  text "3V3" at 1.143,0.773 h1
  text "RST" at -9.627,0.747 h1
dxf:
  drawing of 5576 lines, arcs and shapes, not listed
Board:
  lines w0.152: -15.08,43.65 -15.08,49.45 ; 9.12,49.45 14.92,49.45 ; 14.92,43.65 14.92,49.45 ; -15.08,49.45 -15.08,1.85 -13.63,1.85 cw(c-13.63,1.15) -12.93,1.15 -12.93,-1.5 -4.68,-1.5 -4.68,1.75 cw(c-3.93,1.75) -3.18,1.75 -3.18,-1.5 12.77,-1.5 12.77,1.15 cw(c13.47,1.15) 13.47,1.85 14.92,1.85 14.92,49.45 ; -15.08,49.45 14.92,49.45
spec:
  lines w0.15: 234.244,-25.202 234.244,10.798 284.744,10.798 284.744,-25.202 234.244,-25.202
  lines w0.203: 184.357,28.611 287.227,28.611 ; 184.357,28.671 184.357,89.571 287.227,89.571 287.227,28.571 ; 184.357,31.151 287.227,31.151 ; 184.357,38.771 287.227,38.771 ; 184.357,41.311 287.227,41.311 ; 184.357,51.471 287.227,51.471 ; 184.357,61.631 287.227,61.631 ; 184.357,74.331 287.227,74.331 ; 184.357,76.871 287.227,76.871 ; 184.357,79.411 287.227,79.411 ; 184.357,81.951 287.227,81.951 ; 184.357,84.491 287.227,84.491 ; 184.357,87.031 287.227,87.031 ; 205.947,28.611 205.947,51.471 205.947,61.631 205.947,74.331 ; 205.947,43.851 287.227,43.851 ; 205.947,46.391 287.227,46.391 ; 205.947,48.931 287.227,48.931 ; 205.947,54.011 287.227,54.011 ; 205.947,56.551 287.227,56.551 ; 205.947,59.091 287.227,59.091 ; 222.457,28.611 222.457,31.151 ; 225.632,84.491 225.632,87.031 225.632,89.571 ; 247.857,84.491 247.857,87.031 247.857,89.571 ; 256.747,28.611 256.747,31.151
  text "4" at 235.411,87.793 h1.27
  text "BOARD THICKNESS: 1 mm+/-10%" at 249.032,87.793 h1.27
  text "BOARD NAME:" at 184.992,87.666 h1.27
  text "RAK3362_VB" at 199.851,87.666 h1.27
  text "LAYERS:" at 226.267,87.666 h1.27
  text "UNITS:      MILS" at 184.992,85.126 h1.27
  text "OPEN WINDOWS:" at 226.267,85.126 h1.27
  text "SPELL MODE:" at 248.492,85.126 h1.27
  text "SOLDER MASK:BLACK" at 184.992,82.586 h1.27
  text "SILKSCREEN COLOR:    WHITE" at 184.992,80.046 h1.27
  text "DIELECTRIC MATERIAL: FR-4" at 184.992,77.506 h1.27
  text "1. ENIG" at 206.582,72.426 h1.27
  text "PLATED TECHNICS:" at 184.992,69.251 h1.27
  text "SINGLE IMPEDANCE" at 184.992,57.821 h1.27
  text "[Zo]" at 191.723,53.757 h1.27
  text "L1/L4 6.5/4.7/6.5 width/pitch/width impedance 90 OHM +/-10%" at 208.353,49.504 h1.27
  text "DIFF IMPEDANCE" at 186.008,47.661 h1.27
  text "[Zo]" at 191.723,43.851 h1.27
  text "SHORT NET NO." at 187.405,39.279 h1.27
  text "SHORT NET POSITION" at 232.363,39.279 h1.27
  text "[0]" at 191.723,35.215 h1.27
  text "Please mark:UL/94V-0" at 228.02,29.228 h2.03
  text "REQUIREMENT" at 187.761,29.179 h2.03
  text "TG Value:TG150" at 207.7,29.1 h2.03
  text "1--ARTWORK TOP" at 184.578,6.656 h2.54
  text "Layer Stackup" at 236.198,4.421 h1.27
  text "Thickness (Mil)" at 254.994,4.294 h1.27
  text "Oz" at 277.092,4.167 h1.27
  text "2--ARTWORK GND02" at 184.578,1.576 h2.54
  text "1.4MIL" at 260.709,0.611 h1.27
  text "0.5" at 276.33,0.611 h1.27
  text "Art01" at 240.389,0.357 h1.27
  text "6 MIL" at 259.666,-2.521 h1.27
  text "FR4" at 239.99,-2.643 h1.27
  text "3--ARTWORK POWER03" at 184.578,-3.504 h2.54
  text "1.0" at 276.176,-5.442 h1.27
  text "1.4MIL" at 261.066,-5.458 h1.27
  text "GND02" at 240.044,-5.612 h1.27
  text "4--ARTWORK BOTTOM" at 184.864,-8.33 h2.54
  text "CORE" at 240.036,-8.466 h1.27
  text "22.8MIL" at 261.066,-8.466 h1.27
  text "ART03" at 240.044,-10.866 h1.27
  text "1.0" at 276.457,-10.946 h1.27
  text "1.4MIL" at 261.066,-10.966 h1.27
  text "FR4" at 240.117,-13.666 h1.27
  text "6 MIL" at 259.92,-13.824 h1.27
  text "Art04" at 240.171,-16.308 h1.27
  text "1.4MIL" at 261.217,-16.788 h1.27
  text "0.5" at 276.557,-17.126 h1.27
panel:
  drawing of 896 lines, arcs and shapes, not listed
  text "V-cut" at 82.456,56.539 h4.44
  text "V-cut" at 82.71,26.44 h4.44
  text "V-cut" at 82.71,-3.405 h4.44
  text "D=The board thickness" at 156.9,-4.844 h1.3
  text "B=0.35 0.1MM(0.8MM D 1.2MM)" at 156.948,-8.613 h1.3
  text "B=0.40 0.1MM(1.2MM D 1.6MM)" at 156.948,-12.113 h1.3
  text "B=0.50 0.1MM(1.6MM D 2.5MM)" at 156.948,-15.613 h1.3
  text "Please confirm with EQ if the board thickness" at 156.9,-19.744 h1.3
  text "is D<0.8MM or D>2.5MM when using V-CUT" at 156.54,-23.176 h1.3
  text "C 0.5mm(Design Recommend)" at 156.898,-27.686 h1.91
Bottom Courtyard:
  drawing of 1930 lines, arcs and shapes, not listed
Drill Drawing:
  lines w0.254: 183.581,107.428 185.274,107.428 185.274,109.121 183.581,109.121 183.581,107.428 ; 183.581,111.661 184.004,111.661 184.004,111.238 184.851,111.238 184.851,111.661 185.274,111.661 185.274,112.508 184.851,112.508 184.851,112.931 184.004,112.931 184.004,112.508 183.581,112.508 183.581,111.661 ; 183.581,115.471 184.004,115.471 184.427,115.048 184.851,115.471 185.274,115.471 184.851,115.895 185.274,116.318 184.851,116.318 184.427,116.741 184.004,116.318 183.581,116.318 184.004,115.895 183.581,115.471 ; 183.581,118.858 184.427,119.281 185.274,118.858 184.851,119.705 185.274,120.551 184.427,120.128 183.581,120.551 184.004,119.705 183.581,118.858
  lines w0.381: 182.062,106.285 453.106,106.285 ; 182.062,121.525 453.106,121.525 ; 196.054,102.475 196.054,125.335 ; 211.036,102.475 211.036,125.335 ; 238.968,102.475 238.968,125.335 ; 251.818,102.475 251.818,125.335 ; 270.456,102.475 270.456,125.335 ; 308.545,102.475 308.545,125.335 ; 323.527,102.475 323.527,125.335 ; 342.47,102.475 342.47,125.335 ; 362.53,102.475 362.53,125.335 ; 384.216,102.475 384.216,125.335 ; 418.09,102.475 418.09,125.335 ; 182.062,102.475 453.106,102.475 453.106,125.335 182.062,125.335 182.062,102.475
  text "Symbol" at 184.348,122.668 h1.83
  text "Count" at 197.197,122.668 h1.83
  text "Hole Size" at 212.179,122.668 h1.83
  text "Plated" at 240.111,122.668 h1.83
  text "Hole Type" at 252.961,122.668 h1.83
  text "Drill Layer Pair" at 271.599,122.668 h1.83
  text "Via/Pad" at 309.688,122.668 h1.83
  text "Pad Shape" at 324.67,122.668 h1.83
  text "Template" at 343.613,122.668 h1.83
  text "Description" at 363.673,122.668 h1.83
  text "Hole Tolerance (+)" at 385.359,122.668 h1.83
  text "Hole Tolerance (-)" at 419.233,122.668 h1.83
  text "4" at 197.197,118.858 h1.52
  text "1.500mm (59.06mil)" at 212.179,118.858 h1.52
  text "PTH" at 240.111,118.858 h1.52
  text "Round" at 252.961,118.858 h1.52
  text "Top Layer - Bottom Layer" at 271.599,118.858 h1.52
  text "Pad" at 309.688,118.858 h1.52
  text "Rounded" at 324.67,118.858 h1.52
  text "c260h150z152" at 343.613,118.858 h1.52
  text "4" at 197.197,115.048 h1.52
  text "2.000mm (78.74mil)" at 212.179,115.048 h1.52
  text "NPTH" at 240.111,115.048 h1.52
  text "Round" at 252.961,115.048 h1.52
  text "Top Layer - Bottom Layer" at 271.599,115.048 h1.52
  text "Pad" at 309.688,115.048 h1.52
  text "Rounded" at 324.67,115.048 h1.52
  text "c150hn200" at 343.613,115.048 h1.52
  text "5" at 197.197,111.238 h1.52
  text "1.016mm (40.00mil)" at 212.179,111.238 h1.52
  text "PTH" at 240.111,111.238 h1.52
  text "Round" at 252.961,111.238 h1.52
  text "Top Layer - Bottom Layer" at 271.599,111.238 h1.52
  text "Pad" at 309.688,111.238 h1.52
  text "(Mixed)" at 324.67,111.238 h1.52
  text "(Mixed)" at 343.613,111.238 h1.52
  text "201" at 197.197,107.428 h1.52
  text "0.200mm (7.87mil)" at 212.179,107.428 h1.52
  text "PTH" at 240.111,107.428 h1.52
  text "Round" at 252.961,107.428 h1.52
  text "Top Layer - Bottom Layer" at 271.599,107.428 h1.52
  text "Via" at 309.688,107.428 h1.52
  text "Rounded" at 324.67,107.428 h1.52
  text "(Mixed)" at 343.613,107.428 h1.52
  text "214 Total" at 197.197,103.618 h1.52

## Dimensions
-13.08,63.5 to -13.08,-6.5 on panel
70.92,58.5 to -15.08,58.5 on panel